# Altium PCB NRF24_Tester.PcbDoc
Units mil, origin at the board's own origin, x right, y up, seen from the top; angles counter-clockwise.
Board outline 1780 x 1760 mil, 2 copper layers (Top Layer, Bottom Layer); 43 components, 44 nets, 184 pads, 34 vias.
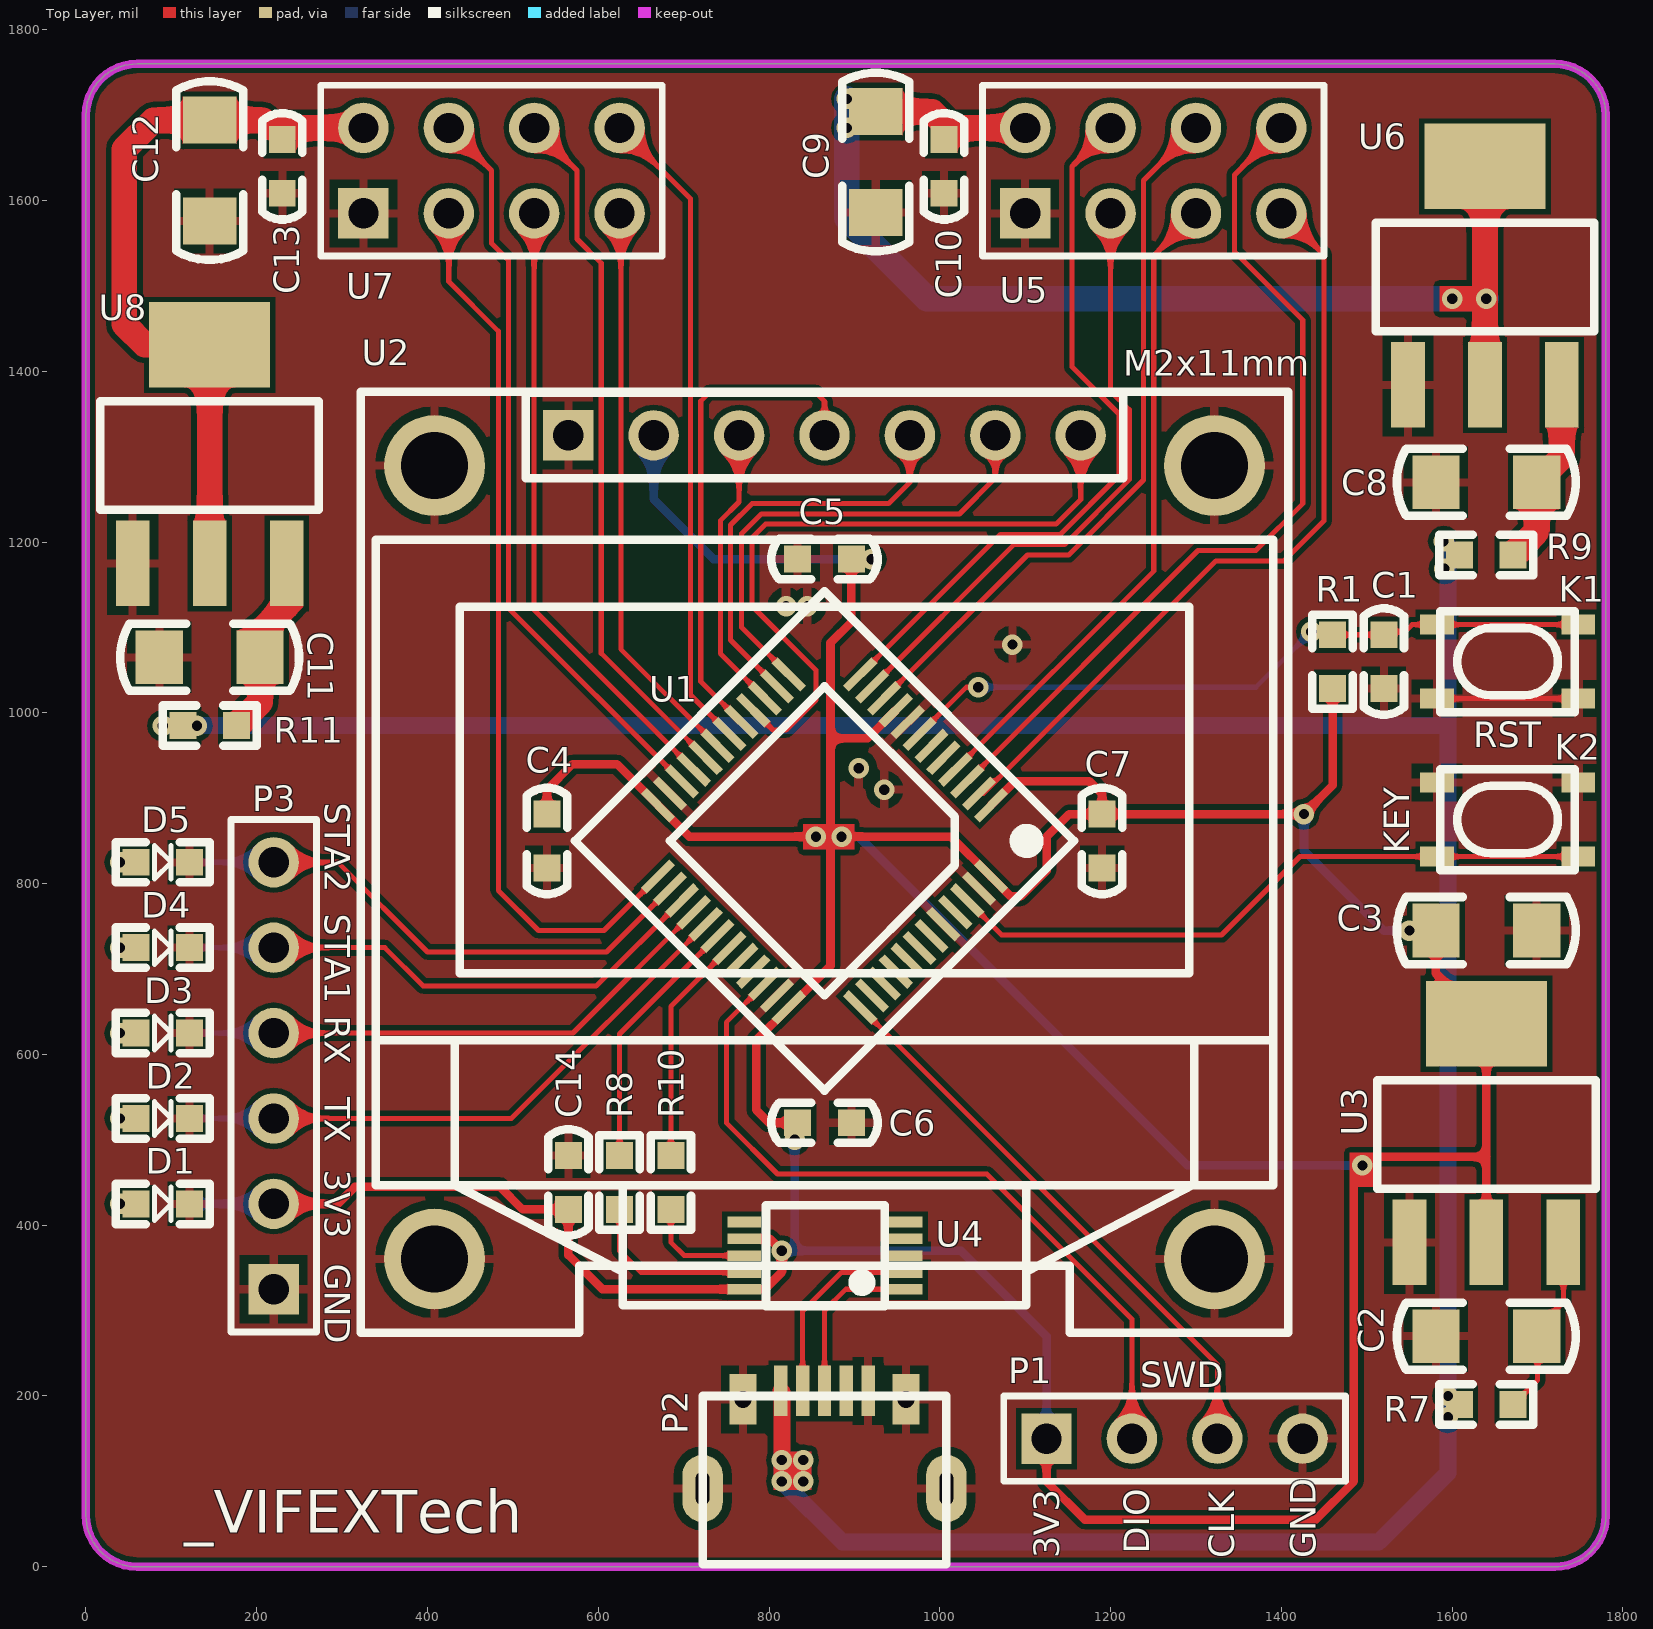
[diagram p0: Top Layer view]
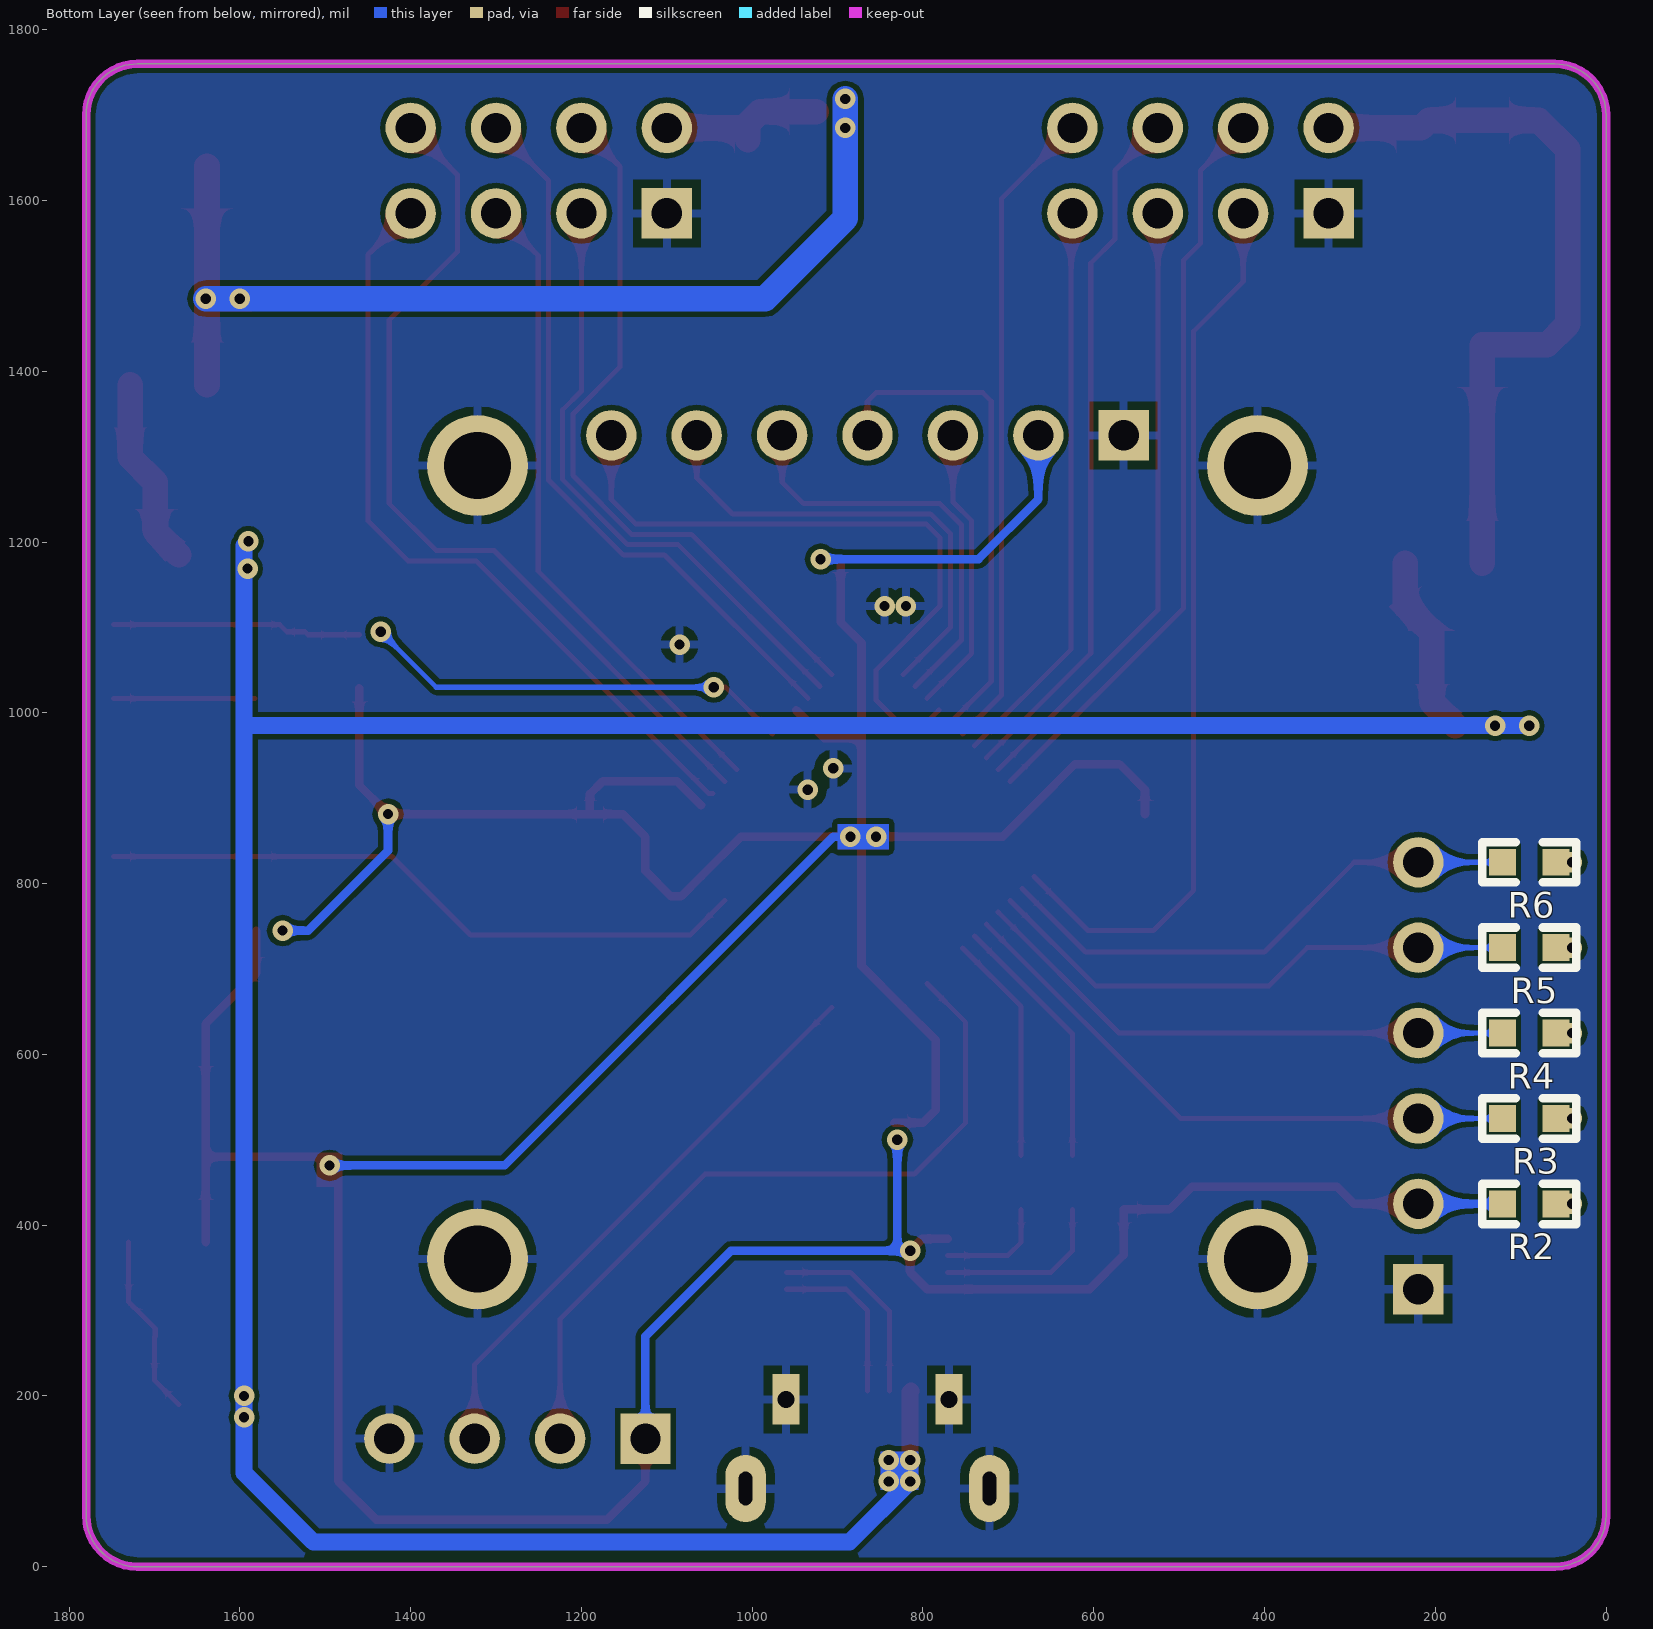
[diagram p1: Bottom Layer view, seen from below]
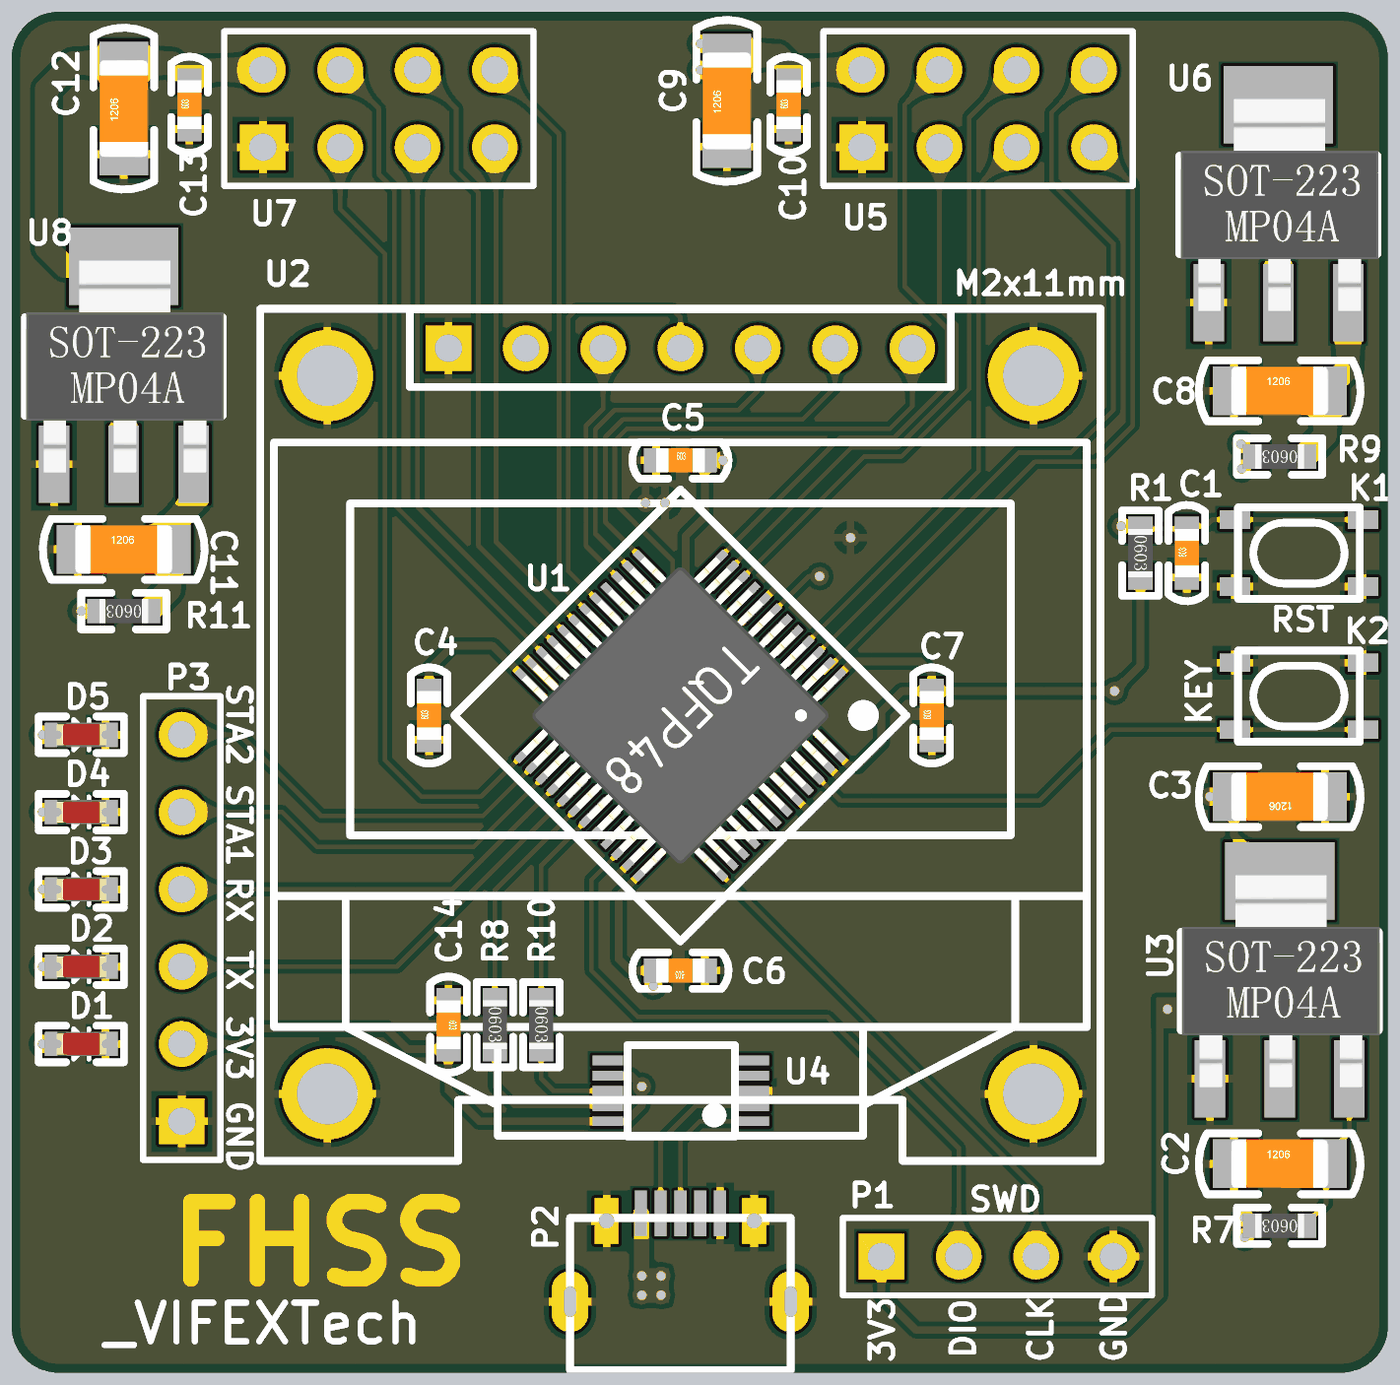
[diagram p2: 3D render of the assembled board from above, using the file's embedded part models]
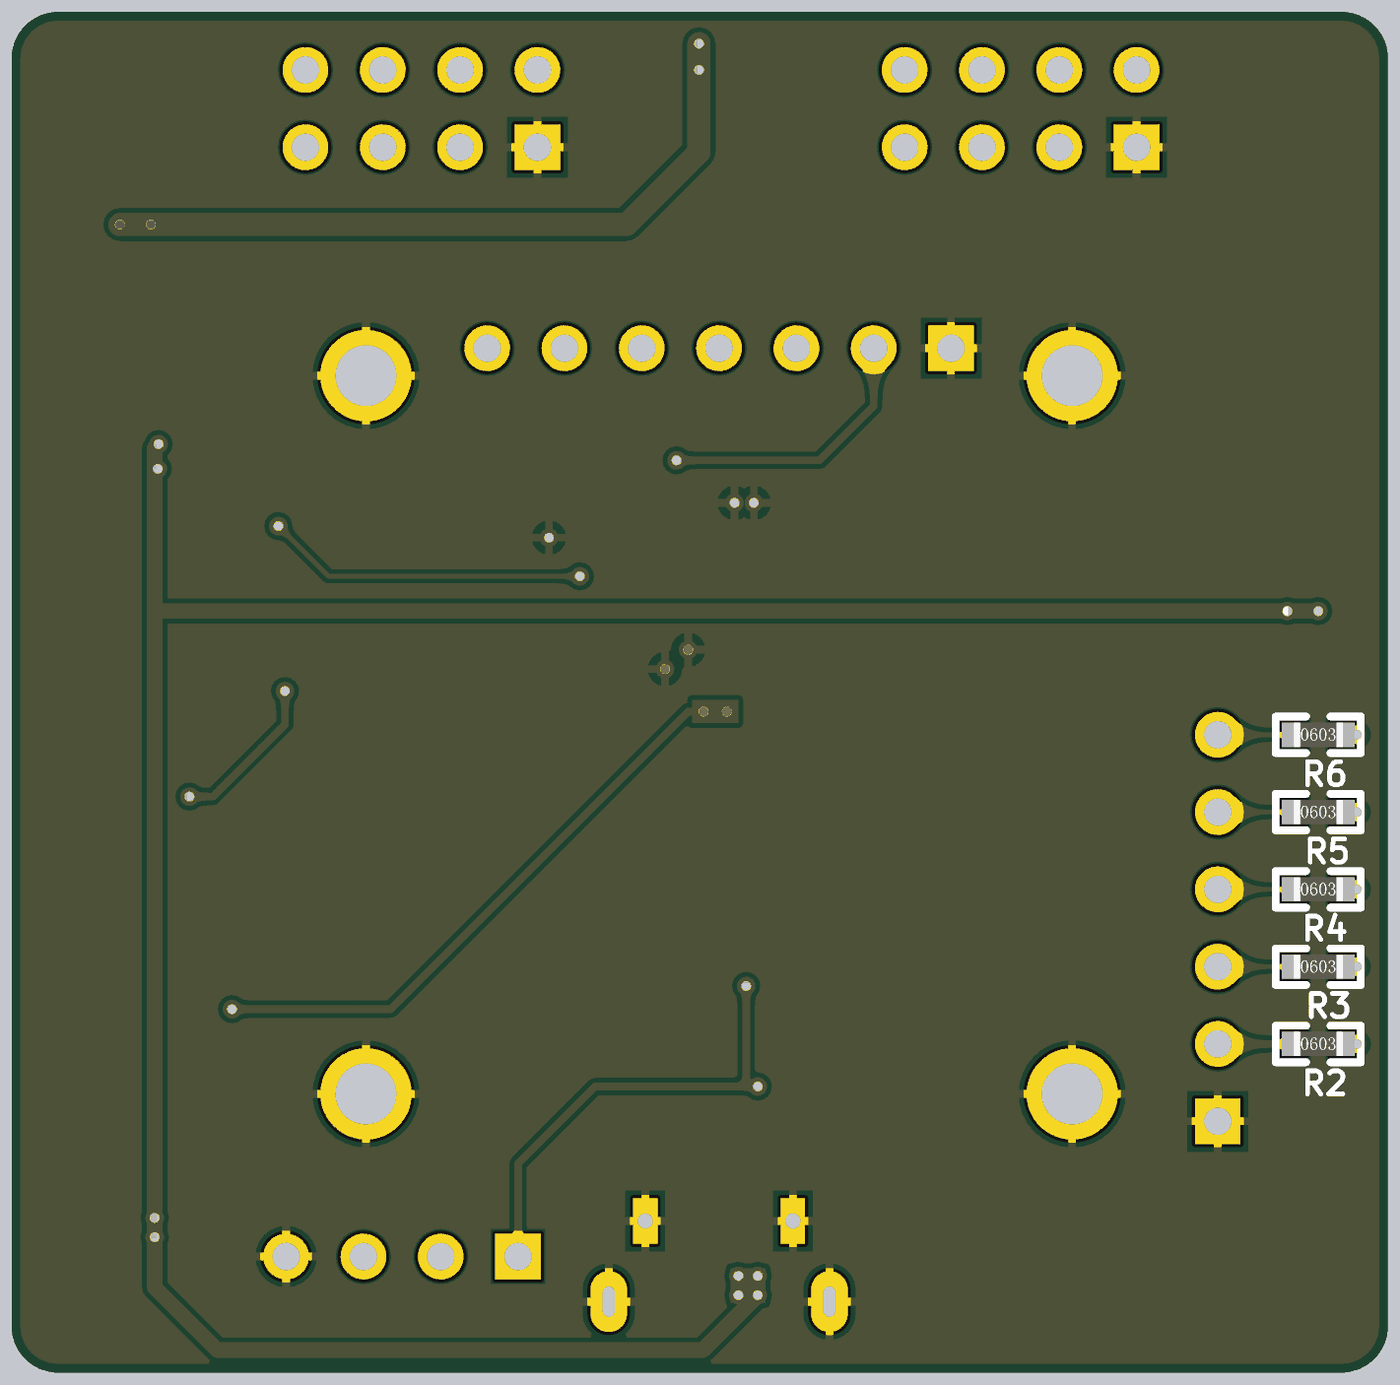
[diagram p3: 3D render of the assembled board from below, using the file's embedded part models]

## Layer stack, top to bottom
Top Solder: solder mask 0.4, Solder Resist, Dk 3.5
Top Layer: signal copper 1.4
Dielectric 1: dielectric 12.6, FR-4, Dk 4.8
Bottom Layer: signal copper 1.4
Bottom Solder: solder mask 0.4, Solder Resist, Dk 3.5

## Board outline
0,60 0,1700 cw(c60,1700) 60,1760 1720,1760 cw(c1720,1700) 1780,1700 1780,60 cw(c1720,60) 1720,0 60,0 cw(c60,60)

## Design rules (kind name [scope] priority, off if disabled: settings)
Clearance [All] p1: gap=6
HoleSize [All] p1 off: absolutevalues=TRUE maxlimit=100 minlimit=1 maxpercent=80.000 minpercent=20.000
HoleToHoleClearance [All] p1 off: gap=10 allowstackedmicrovias=TRUE
LayerPairs [All] p1 off: enforce=TRUE
MinimumSolderMaskSliver [All] p1 off: minsoldermaskwidth=10
NetAntennae [All] p1 off: netantennaetolerance=0
PolygonConnect [All] p1: connectstyle=Relief reliefconductorwidth=10 reliefentries=4 polygonreliefangle="90 Angle" airgapwidth=10
RoutingVias [All] p1: holewidth=12 width=24 viastyle="Through Hole" minholewidth=12 minwidth=24 maxholewidth=12 maxwidth=24
SilkToSilkClearance [All] p1 off: silktosilkclearance=10
SilkToSolderMaskClearance [IsPad] p1 off: minsilkscreentomaskgap=10 clearancetoexposedcopper=TRUE
SolderMaskExpansion [All] p1: expansion=4
Width [All] p1: maxlimit=100 minlimit=6 preferedwidth=6
23 further rules are at their usual default settings.

## Components (designator, comment, footprint, x,y, rotation, side; value= is the part's Value field where it differs from the comment)
C1 "104" 电容_C0603 1520,1060 r90 top
C2 "22uF" 电容_C1206 1640,270 r0 top
C3 "22uF" 电容_C1206 1640,745 r180 top
C4 "1uF" 电容_C0603 540,850 r90 top
C5 "1uF" 电容_C0603 865,1180 r0 top
C6 "1uF" 电容_C0603 865,520 r180 top
C7 "1uF" 电容_C0603 1190,850 r90 top
C8 "22uF" 电容_C1206 1640,1270 r0 top
C9 "22uF" 电容_C1206 925,1645 r90 top
C10 "1uF" 电容_C0603 1005,1640 r90 top
C11 "22uF" 电容_C1206 145,1065 r0 top
C12 "22uF" 电容_C1206 145,1635 r90 top
C13 "1uF" 电容_C0603 230,1640 r90 top
C14 "1uF" 电容_C0603 565,450 r270 top
D1 "red" LED_0603 90,425 r0 top
D2 "red" LED_0603 90,525 r0 top
D3 "red" LED_0603 90,625 r0 top
D4 "red" LED_0603 90,725 r0 top
D5 "red" LED_0603 90,825 r0 top
K1 "SKRP" 开关按键_SKRP 1665,1060 r0 top
K2 "SKRP" 开关按键_SKRP 1665,875 r180 top
P1 "SWD" HDR1X4 1125,150 r0 top
P2 "MICRO USB" "接插件_MICRO 牛角插座 USB 直边" 865,200 r180 top
P3 "LED_STA" HDR1X6 220,325 r90 top
R1 "10K" 电阻_R0603 1460,1060 r270 top
R2 "1K" 电阻_R0603 90,425 r180 bottom
R3 "1K" 电阻_R0603 90,525 r180 bottom
R4 "1K" 电阻_R0603 90,625 r180 bottom
R5 "1K" 电阻_R0603 90,725 r180 bottom
R6 "1K" 电阻_R0603 90,825 r180 bottom
R7 "1R" 电阻_R0603 1640,190 r180 top
R8 "100R" 电阻_R0603 625,450 r270 top
R9 "1R" 电阻_R0603 1640,1185 r180 top
R10 "100R" 电阻_R0603 685,450 r270 top
R11 "1R" 电阻_R0603 145,985 r180 top
U1 "STM32F103C8T6" ST主控_LQFP48 865,850 r225 top
U2 "OLED" "Display_OLED 12864 7pin" 565,1325 r0 top
U3 "AMS1117" 稳压芯片_SOT-223 1550,380 r0 top
U4 "CH340E" 串口_MSOP10 960,325 r90 top
U5 "NRF24L01" HDR2X4 1100,1585 r0 top
U6 "AMS1117" 稳压芯片_SOT-223 1548.25,1384.03 r0 top
U7 "NRF24L01" HDR2X4 325,1585 r0 top
U8 "AMS1117" 稳压芯片_SOT-223 54.84,1175 r0 top

## Footprints (in the part's own frame and the unit in brackets; to place one, negate y for a bottom-side part, rotate by r counter-clockwise, add the part's x,y. Pads: shape width x height; smd on the part's side, far side on the other; paste and mask are expansions set on the pad)
"Display_OLED 12864 7pin" [mm]
  round 3 hole 2: 0(-3.98,-24.5) 0(-3.98,-0.9) 0(19.22,-24.5) 0(19.22,-0.9)
  rect 1.5x1.5 hole 0.9: 1(0,0)
  round 1.5 hole 0.9: 2(2.54,0) 3(5.08,0) 4(7.62,0) 5(10.16,0) 6(12.7,0) 7(15.24,0)
  silkscreen extent -6.18,-26.7 21.42,1.3
HDR1X4 [mm] "Connector; Header; 4 Position"
  rect 1.5x1.5 hole 0.9: 1(0,0)
  round 1.5 hole 0.9: 2(2.54,0) 3(5.08,0) 4(7.62,0)
  silkscreen extent -1.27,-1.27 8.89,1.27
HDR1X6 [mm] "Connector; Header; 6 Position"
  rect 1.5x1.5 hole 0.9: 1(0,0)
  round 1.5 hole 0.9: 2(2.54,0) 3(5.08,0) 4(7.62,0) 5(10.16,0) 6(12.7,0)
  silkscreen extent -1.27,-1.27 13.97,1.27
HDR2X4 [mm] "Connector; Header; 4x2 Position"
  rect 1.5x1.5 hole 0.9: 1(0,0)
  round 1.5 hole 0.9: 2(0,2.54) 3(2.54,0) 4(2.54,2.54) 5(5.08,0) 6(5.08,2.54) 7(7.62,0) 8(7.62,2.54)
  silkscreen extent -1.27,-1.27 8.89,3.81
LED_0603 [mm]
  rect 0.8x0.8 smd: A(-0.8,0) K(0.8,0)
  silkscreen extent -1.4,-0.6 1.4,0.6, body extent -0.8,-0.4 0.82,0.4, height 0.6
ST主控_LQFP48 [mm]
  rect 1.2x0.25 smd: 1(-4.25,2.75) 2(-4.25,2.25) 3(-4.25,1.75) 4(-4.25,1.25) 5(-4.25,0.75) 6(-4.25,0.25) 7(-4.25,-0.25) 8(-4.25,-0.75) 9(-4.25,-1.25) 10(-4.25,-1.75) 11(-4.25,-2.25) 12(-4.25,-2.75) 25(4.25,-2.75) 26(4.25,-2.25) 27(4.25,-1.75) 28(4.25,-1.25) 29(4.25,-0.75) 30(4.25,-0.25) 31(4.25,0.25) 32(4.25,0.75) 33(4.25,1.25) 34(4.25,1.75) 35(4.25,2.25) 36(4.25,2.75)
  rect 0.25x1.2 smd: 13(-2.75,-4.25) 14(-2.25,-4.25) 15(-1.75,-4.25) 16(-1.25,-4.25) 17(-0.75,-4.25) 18(-0.25,-4.25) 19(0.25,-4.25) 20(0.75,-4.25) 21(1.25,-4.25) 22(1.75,-4.25) 23(2.25,-4.25) 24(2.75,-4.25) 37(2.75,4.25) 38(2.25,4.25) 39(1.75,4.25) 40(1.25,4.25) 41(0.75,4.25) 42(0.25,4.25) 43(-0.25,4.25) 44(-0.75,4.25) 45(-1.25,4.25) 46(-1.75,4.25) 47(-2.25,4.25) 48(-2.75,4.25)
  silkscreen extent -5.25,-5.25 5.25,5.25, body extent -4.51,-4.51 4.51,4.51, height 1.1
串口_MSOP10 [mm]
  rect 0.32x1 smd: 1(0,0) 2(0.5,0) 3(1,0) 4(1.5,0) 5(2,0) 6(2,4.8) 7(1.5,4.8) 8(1,4.8) 9(0.5,4.8) 10(0,4.8)
  silkscreen extent -0.5,0.62 2.5,4.15
开关按键_SKRP [mm]
  rect 1x0.6 smd: 1(-2.1,-1.1) 1(2.1,-1.1) 2(-2.1,1.1) 2(2.1,1.1)
  silkscreen extent -2,-1.5 2,1.5
"接插件_MICRO 牛角插座 USB 直边" [mm]
  oval 1.2x2 hole 0.4 slot 1 at 90 deg: 0(-3.625,2.75) 0(3.625,2.75)
  rect 0.8x1.5 hole 0.5: 0(-2.425,0.1) 0(2.425,0.1)
  rect 0.4x1.5 smd: 1(1.3,-0.15) 2(0.65,-0.15) 3(0,-0.15) 4(-0.65,-0.15) 5(-1.3,-0.15)
  silkscreen extent -3.62,0 3.62,5
电容_C0603 [mm]
  rect 0.8x0.8 smd: 1(-0.8,0) 2(0.8,0)
  silkscreen extent -1.58,-0.6 1.58,0.6, body extent -0.8,-0.4 0.8,0.4, height 0.3
电容_C1206 [mm]
  rect 1.4x1.6 smd: 1(-1.5,0) 2(1.5,0)
  silkscreen extent -2.66,-1 2.66,1, body extent -1.6,-0.8 1.6,0.8, height 1
电阻_R0603 [mm]
  rect 0.8x0.8 smd: 1(-0.8,0) 2(0.8,0)
  silkscreen extent -1.4,-0.6 1.4,0.6, body extent -0.8,-0.4 0.8,0.4, height 0.45
稳压芯片_SOT-223 [mm]
  rect 1x2.54 smd: 1(0,0) 2(2.29,0) 3(4.58,0)
  rect 3.6x2.54 smd: 2(2.29,6.5)
  silkscreen extent -0.96,1.6 5.54,4.83, body extent -0.92,-0.27 5.58,6.69, height 1.7

## Part data
C1 C2 C3 C4 C5 C6 C7 C8 C9 C10 C11 C12 C13 C14: library part cap
D1 D2 D3 D4 D5: library part LED
K1 K2: library part SW-PB
P1: library part "Header 4", "Header, 4-Pin"
P2: library part "MICRO USB 5PIN"
P3: library part "Header 6", "Header, 6-Pin"
R1 R2 R3 R4 R5 R6 R7 R8 R9 R10 R11: library part Res
U2: library part "OLED 12864 7Pin"

## Via types
v1: diameter 24, hole 12, Top Layer to Bottom Layer, tented both sides, 34 vias

## Nets (pads, with @x,y where several pads share a name; then routed paths per layer and width w, separated by ;. In a path a pad name is that pad's centre, name@x,y a point inside that pad or via, vN(x,y) a via of type N, cw(c..) or ccw(c..) an arc to the next point about the centre after c; other vN are vias at no path point)
3V3: C3.2 C4.2 C5.2 C6.2 C7.2 C14.2 P1.1 P3.2 R1.2 R2.1 U1.1 U1.9 U1.24 U1.36 U1.48 U2.2 U3.2 U4.7 U4.10 | length 6396.9
  Top Layer w10: P3.2 295,425 315,445 485,445 511.5,418.5 C14.2 565,365 605,325 U4.10 795,325 815,345 v1(815,370) 800.94,384.06 U4.7 ; C4.2 540,910 570,940 621.89,940 U1.24 706.89,855 v1(855,855) 872,855 ; C6.2 800,520 785,535 785,616.89 U1.36 872,703.89 872,855 ; C5.2 896.5,1106.5 872,1082 872,970 ; U1.9 915.4,970 872,970 ; U1.1 1088.11,920 1175,920 1190,905 C7.2 ; P1.1 1125,100 1170,55 1440,55 1485,100 1485,455 1510,480 1640.16,480 ; R1.2 1460,915 v1(1426.5,881.5) C7.2 ; C3.2 1580.94,695.12 1640.16,635.91 1640.16,480 ; U3.2@1640.16,380 1640.16,480 ; 872,855 872,970 ; 872,855 1013.11,855 U1.48 1083.11,785 1095,785 1125,815 1125,855 1151.5,881.5 C7.2
  Bottom Layer w10: R2.1 P3.2 ; U2.2 665,1250 735,1180 v1(920,1180) ; v1(830,500) 830,370 v1(815,370) 1025,370 1125,270 P1.1 ; v1(885,855) 905,855 1290,470 v1(1495,470) ; v1(1426.5,881.5) 1426.5,838.5 1520,745 v1(1550,745)
5V: P2.1 R7.2 R9.2 R11.2 | length 3542.4
  Top Layer w20: P2.1 815,204.72 v1(815,100)
  Bottom Layer w20: v1(90,985) 1590,985 ; v1(815,100) 886,29 1514,29 1595,110 v1(1595,175) v1(1595,200) 1595,1196 v1(1590,1201)
  other v1: 840,100 815,125 840,125 130,985 1591,1169
DBG_RX: R10.1 U1.31 | length 271.7
  Top Layer w6: R10.1 685,656.08 U1.31
DBG_TX: R8.1 U1.30 | length 304.7
  Top Layer w6: R8.1 625,623.92 U1.30
GND: C1.1 C2.1 C3.1 C4.1 C5.1 C6.1 C7.1 C8.1 C9.1 C10.1 C11.1 C12.1 C13.1 C14.1 D1.K D2.K D3.K D4.K D5.K K1.1 K2.1 P1.4 P2.0 P2.5 P3.1 U1.8 U1.23 U1.35 U1.44 U1.47 U2.0 U2.1 U3.1 U4.3 U5.1 U6.1 U7.1 U8.1 | length 165.4
  Top Layer w6: K1.1@1582.32,1016.69 K1.1@1747.68,1016.69
  other v1: 935,910 905,935 1085,1080 820,1125 845,1125
KEY: K2.2 U1.46 | length 770.4
  Top Layer w6: U1.46 1072.44,740 1330,740 1421.69,831.69 1582.32,831.69 K2.2@1747.68,831.69
LED_RX: P3.4 R4.1 U1.28 | length 649
  Top Layer w6: P3.4 570.4,625 U1.28
  Bottom Layer w6: R4.1 P3.4
LED_STA1: P3.5 R5.1 U1.27 | length 636.7
  Top Layer w6: P3.5 350,725 395,680 597.56,680 U1.27
  Bottom Layer w6: R5.1 P3.5
LED_STA2: P3.6 R6.1 U1.26 | length 636.8
  Top Layer w6: P3.6 295,825 400,720 609.72,720 U1.26
  Bottom Layer w6: R6.1 P3.6
LED_TX: P3.3 R3.1 U1.29 | length 698.6
  Top Layer w6: P3.3 498.24,525 U1.29
  Bottom Layer w6: R3.1 P3.3
NetC2_2: C2.2 R7.1 U3.3 | length 215.1
  Top Layer w6: R7.1 1700,218.5 1700,269.06 C2.2 1699.06,279.06 1730.32,310.32 U3.3
NetC8_2: C8.2 R9.1 U6.3 | length 222.7
  Top Layer w30: R9.1 1699.06,1212.56 C8.2 1728.57,1299.51 U6.3
NetC11_2: C11.2 R11.1 U8.3 | length 214.3
  Top Layer w30: R11.1 204.06,1012.56 C11.2 204.06,1094.06 235.16,1125.16 U8.3
NetD1_A: D1.A R2.2
  other v1: 40,425
NetD2_A: D2.A R3.2
  other v1: 40,525
NetD3_A: D3.A R4.2
  other v1: 40,625
NetD4_A: D4.A R5.2
  other v1: 40,725
NetD5_A: D5.A R6.2
  other v1: 40,825
NetR8_2: R8.2 U4.9 | length 205
  Top Layer w6: R8.2 625,370 650.32,344.68 U4.9
NetR10_2: R10.2 U4.8 | length 131
  Top Layer w6: R10.2 685,380 700.63,364.37 U4.8
NRF1_CE: U1.11 U5.3 | length 722.7
  Top Layer w6: U1.11 1086.72,1197 1145.94,1197 1222,1273.06 1222,1354.98 1200,1376.98 U5.3
NRF1_CSN: U1.12 U5.4 | length 848.2
  Top Layer w6: U1.12 1070.89,1209 1140.97,1209 1210,1278.03 1210,1350 1155,1405 1155,1640 U5.4
NRF1_IRQ: U1.3 U5.8 | length 1023.7
  Top Layer w6: U1.3 1302.44,1190 1370,1190 1425,1245 1425,1460 1345,1540 1345,1630 U5.8
NRF1_MISO: U1.2 U5.7 | length 918
  Top Layer w6: U1.2 1051.02,905.68 1323.34,1178 1403,1178 1450,1225 1450,1536.75 1401.75,1585 U5.7
NRF1_MOSI: U1.10 U5.6 | length 847.6
  Top Layer w6: U1.10 1102.56,1185 1150.91,1185 1238.53,1272.62 1238.53,1623.53 U5.6
NRF1_SCK: U1.4 U5.5 | length 768.2
  Top Layer w6: U1.4 1250.53,1165.93 1250.53,1535.53 U5.5
NRF1_VCC: C9.2 C10.2 U5.2 U6.2 | length 1396.7
  Top Layer w30: C9.2 990.94,1704.06 1005,1690 C10.2 1005,1685 U5.2 ; U6.2@1638.41,1384.03 U6.2@1638.41,1639.94
  Bottom Layer w30: v1(891,1719) 891,1579 985,1485 v1(1640,1485)
  other v1: 1600,1485 891,1685
NRF2_CE: U1.25 U7.3 | length 1049.8
  Top Layer w6: U7.3 425,1505 483,1447 483,792 530,745 606.89,745 U1.25
NRF2_CSN: U1.22 U7.4 | length 878.5
  Top Layer w6: U7.4 475,1635 475,1550 495,1530 495,1122.56 U1.22
NRF2_IRQ: U1.18 U7.8 | length 763
  Top Layer w6: U7.8 708,1602 708,1020.92 U1.18
NRF2_MISO: U1.19 U7.7 | length 671.2
  Top Layer w6: U7.7 626.47,1583.53 626.47,1074.61 U1.19
NRF2_MOSI: U1.20 U7.6 | length 820.7
  Top Layer w6: U7.6 575,1635 575,1555 603.53,1526.47 603.53,1069.71 U1.20
NRF2_SCK: U1.21 U7.5 | length 728.9
  Top Layer w6: U7.5 525,1120.4 U1.21
NRF2_VCC: C12.2 C13.2 U7.2 U8.2 | length 868.7
  Top Layer w30: U8.2@145,1175 145,1430.91 69.09,1430.91 45,1455 45,1660 79.06,1694.06 C12.2 207.44,1694.06 216.5,1685 U7.2
NRST: C1.2 K1.2 R1.1 U1.7 | length 800.8
  Top Layer w6: U1.7 1031.08,1030 v1(1045,1030) ; R1.1 C1.2 1523.5,1095 1545,1095 1553.31,1103.31 1582.32,1103.31 K1.2@1747.68,1103.31
  Bottom Layer w6: v1(1045,1030) 1370,1030 v1(1435,1095)
OLED_CS: U1.16 U2.7 | length 797.3
  Top Layer w6: U1.16 804.6,980 820,980 855,1015 855,1050 780,1125 780,1205 796,1221 1136,1221 1165,1250 U2.7
OLED_DC: U1.13 U2.6 | length 561.9
  Top Layer w6: U1.13 768,1100.11 768,1209.97 791.03,1233 1023,1233 1065,1275 U2.6
OLED_RES: U1.14 U2.5 | length 497.3
  Top Layer w6: U1.14 755,1085.28 755,1220 780,1245 940,1245 965,1270 U2.5
OLED_SCLK: U1.15 U2.3 | length 338.8
  Top Layer w6: U2.3 765,1246.97 743,1224.97 743,1069.44 U1.15
OLED_SDIN: U1.17 U2.4 | length 588.8
  Top Layer w6: U1.17 720,1036.76 720,1365 730,1375 855,1375 865,1365 U2.4
SWCLK: P1.3 U1.37 | length 678.4
  Top Layer w6: U1.37 1325,236.89 P1.3
SWDIO: P1.2 U1.34 | length 892
  Top Layer w6: U1.34 750,637.56 750,520 810,460 1055,460 1225,290 P1.2
UD+: P2.3 U4.1 | length 199.4
  Top Layer w6: P2.3 865,300 890,325 U4.1
UD-: P2.2 U4.2 | length 232.8
  Top Layer w6: P2.2 839.41,299.41 884.68,344.68 U4.2
pads on no net: P2.4 U1.5 U1.6 U1.32 U1.33 U1.38 U1.39 U1.40 U1.41 U1.42 U1.43 U1.45 U4.4 U4.5 U4.6

## Polygon pours and split planes (outlines as drawn)
GND on Top Layer "GND" (solid, remove dead copper, pour order 0): -115,1840 -100,1825 1855,1825 1855,-105 1920,-170 1895,-145 -70,-145
GND on Bottom Layer "GND" (solid, remove dead copper, pour order 2): -110,1855 2010,1855 1970,1815 1970,-175 -190,-175 -225,-210

## Keep-outs
Keep-Out Layer:
  the board outline again, w10

## Other copper
Top Layer:
  rectangle net 5V: 805,90 850,135
  rectangle net 3V3: 840,840 900,870
  rectangle net 3V3: 1480,445 1510,485
  rectangle net NRF1_VCC: 1585,1470 1645,1500
Bottom Layer:
  rectangle net 5V: 805,90 850,135
  rectangle net 3V3: 840,840 900,870

## Silkscreen, mask and mechanical layers (free items; w line width, h text height)
Top Overlay:
  text "M2x11mm" at 1215,1395 h30
  text "RST" at 1625,960 h30
  text "STA2" at 280,895 h30 r270
  text "KEY" at 1550,835 h30 r90
  text "STA1" at 280,765 h30 r270
  text "RX" at 280,645 h30 r270
  text "TX" at 280,550 h30 r270
  text "3V3" at 280,465 h30 r270
  text "GND" at 280,355 h30 r270
  text "SWD" at 1235,210 h30
  text "_VIFEXTech" at 115,40 h50
  text "DIO" at 1245,15 h30 r90
  text "3V3" at 1140,10 h30 r90
  text "CLK" at 1345,10 h30 r90
  text "GND" at 1440,10 h30 r90
Top Solder:
  text "FHSS" at 195,120 h100
Mechanical 1:
  the board outline again, w10